# Altium PCB ZLS-028.PcbDoc
Units mil, origin at the board's own origin, x right, y up, seen from the top; angles counter-clockwise.
Board outline 5999.86 x 2000.09 mil, 3 copper layers (Top Layer, OVA, Bottom Layer), stack 16.817 mil thick; 18 components, 48 nets, 187 pads, 13 vias.
Unrouted connection lines stored in the file: 12.
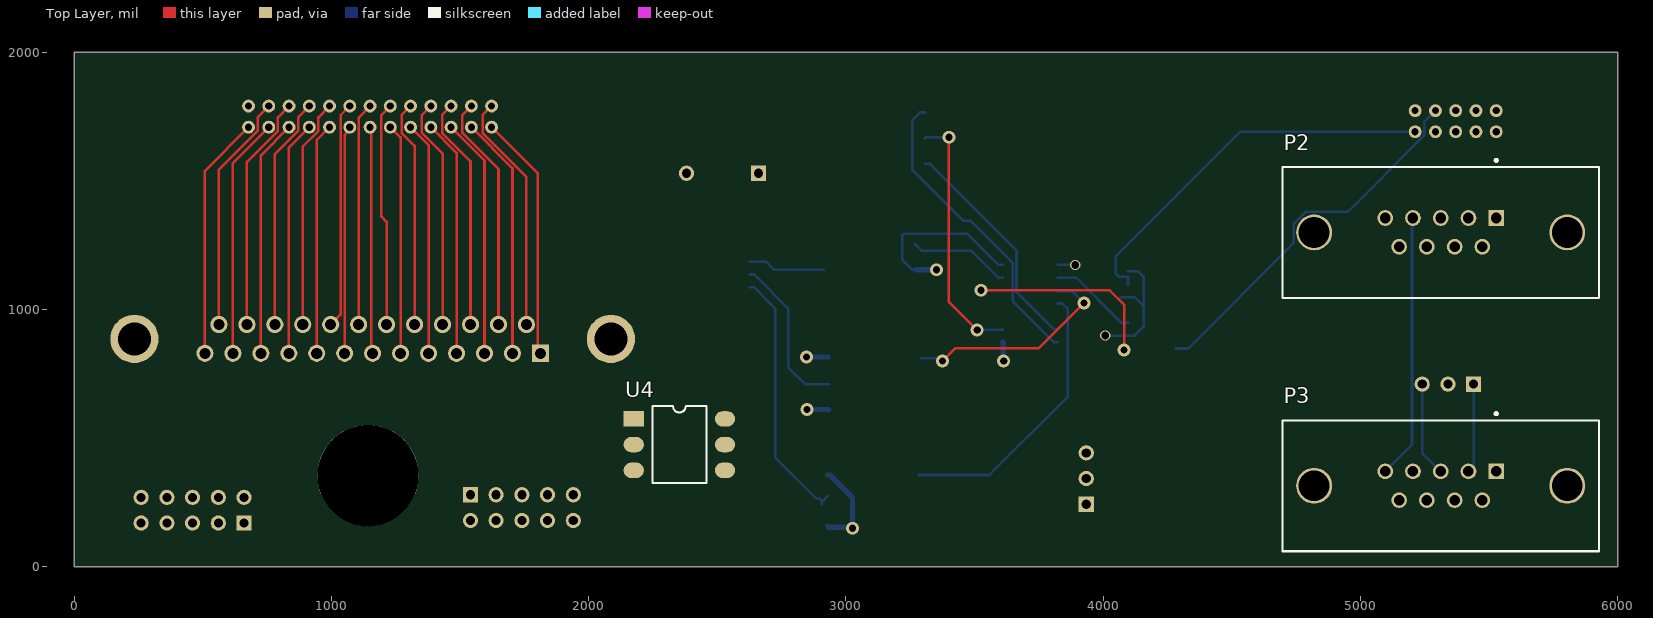
[diagram p0: Top Layer view]
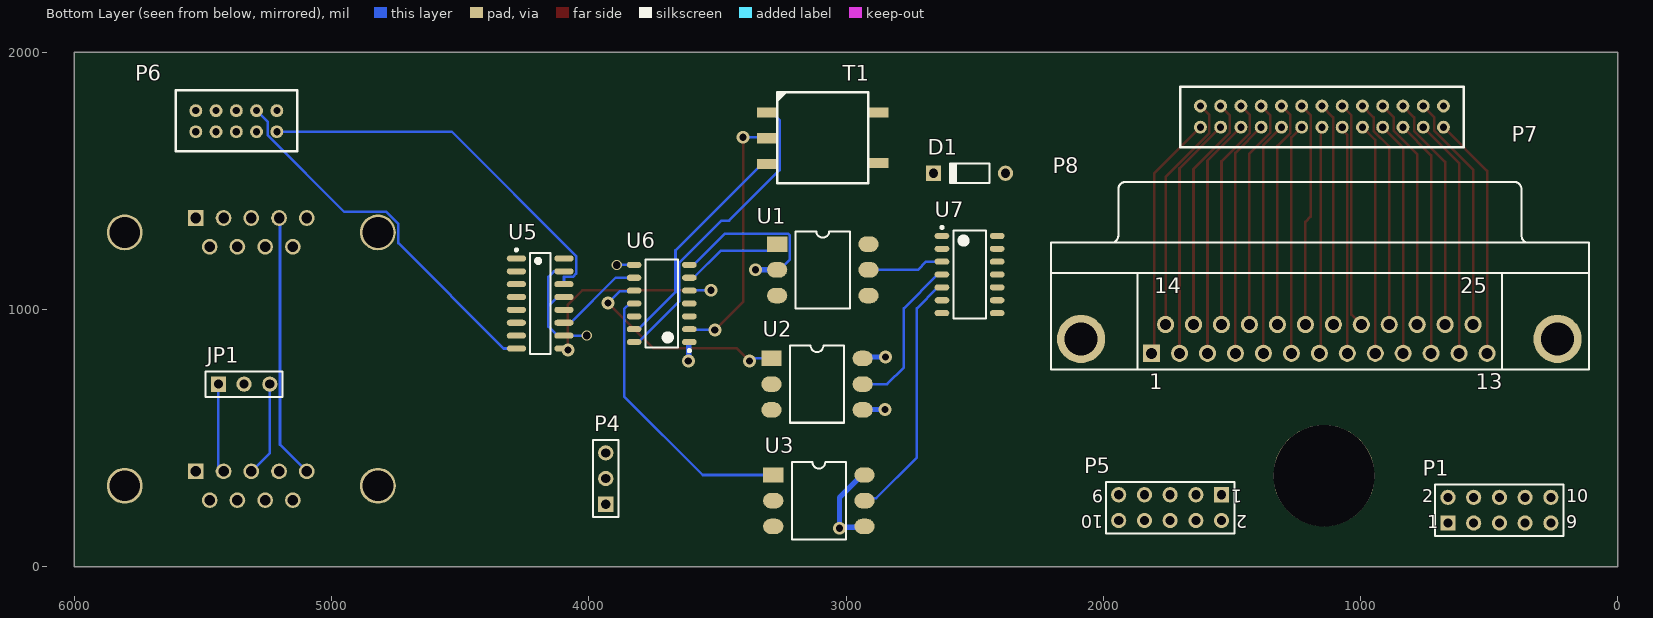
[diagram p1: Bottom Layer view, seen from below]
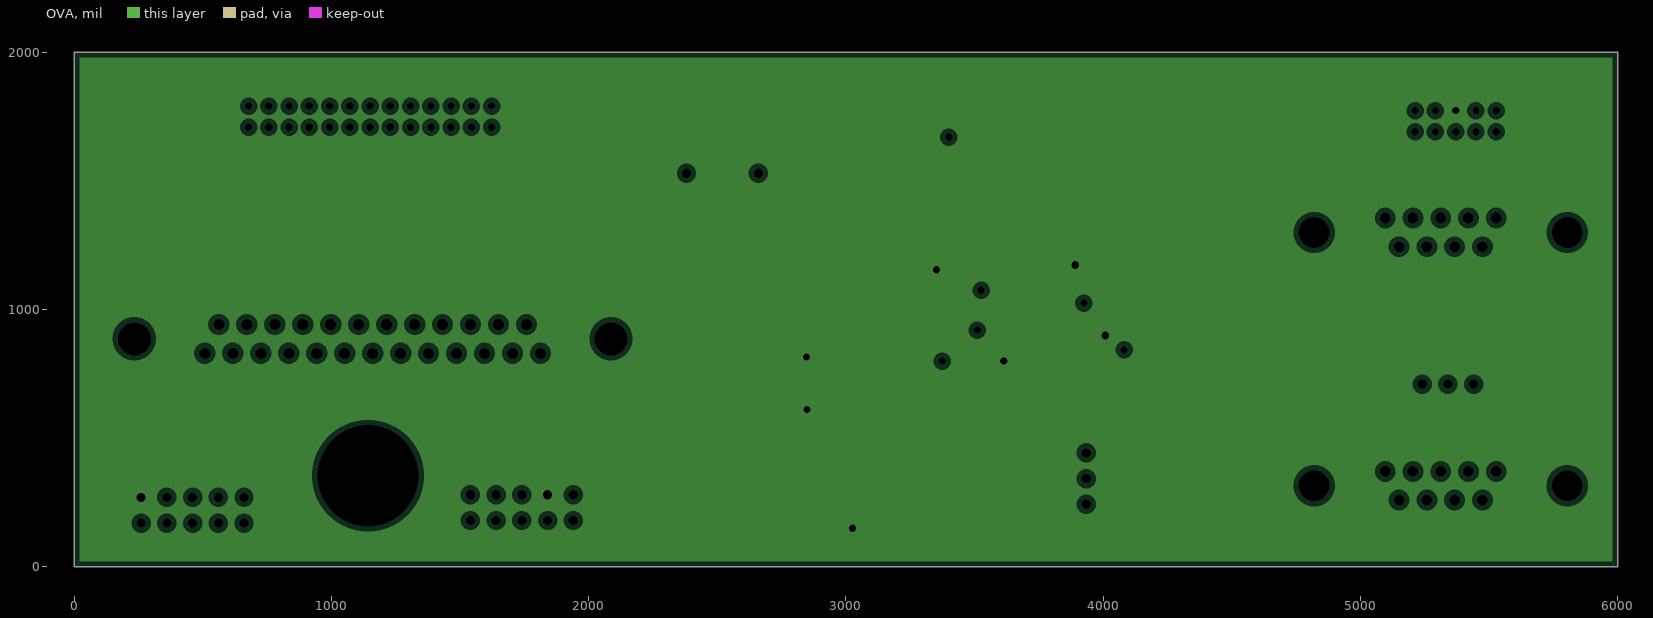
[diagram p2: OVA, clearances drawn from the general rule]

## Layer stack, top to bottom
Top Solder: solder mask 0.4, Solder Resist, Dk 3.5
Top Layer: signal copper 1.4
OVA: plane copper 1.417, net OVA
Dielectric 1: dielectric 12.6, FR-4, Dk 4.8
Bottom Layer: signal copper 1.4
Bottom Solder: solder mask 0.4, Solder Resist, Dk 3.5

## Board outline
0.14,2000.09 0.14,0 6000,0 6000,2000.09

## Design rules (kind name [scope] priority, off if disabled: settings)
Clearance [All] p1: gap=5 ignorepadtopadclearanceinfootprint=FALSE
PlaneClearance [All] p1: clearance=20
PlaneConnect [All] p1: planeconnectstyle=Relief reliefexpansion=20 reliefentries=4 reliefconductorwidth=10 reliefairgap=10
PolygonConnect [All] p1: connectstyle=Relief reliefconductorwidth=10 reliefentries=4 polygonreliefangle="90 Angle" airgapwidth=10
RoutingVias [All] p1: holewidth=15 width=30 viastyle="Through Hole" minholewidth=15 minwidth=30 maxholewidth=28 maxwidth=50
SolderMaskExpansion [All] p1: expansion=4
Width [All] p1: maxlimit=50 minlimit=10 preferedwidth=10
28 further rules are at their usual default settings.

## Classes and differential pairs
component class Connectors: JP1 P1 P2 P3 P5 P6 P7 P8
component class ZLS-028: D1 P4 T1 U1 U2 U3 U4 U5 U6 U7

## Components (designator, comment, footprint, x,y, rotation, side; value= is the part's Value field where it differs from the comment)
D1 "Diode 1N4148" DO-35 2519.69,1529.92 r0 bottom
JP1 "Header 3" HDR1X3 5440,710 r180 bottom
P1 "Header 5X2" HDR2X5 660,170 r180 bottom
P2 "1-5747150-4" TECO-1-5747150-4_V 5312,1300 r0 top locked
P3 "1-5747150-4" TECO-1-5747150-4_V 5312,315 r0 top locked
P4 "Header 3" HDR1X3 3934,243 r90 bottom
P5 "Header 5X2" HDR2X5 1540,280 r0 bottom
P6 "STMM-105-01-G-D" STMM-105-01-G-D 5370.08,1732.28 r0 bottom
P7 "2.00 mm Shrouded Terminal Strip, Cable Mate" STMM-113-01-G-D 1150,1750 r180 bottom
P8 "D Connector 25" DSUB1.385-2H25A 1160,1260 r180 bottom locked
T1 "78250MC" 78250MC 3307.09,1766.14 r180 bottom
U1 "4N26" "6-SMD Gull Wing" 3267.72,1254.33 r180 bottom
U2 "4N26" "6-SMD Gull Wing" 3290,810 r180 bottom
U3 "4N26" "6-SMD Gull Wing" 3283,357 r180 bottom
U4 "4N26" "6-SMD Gull Wing" 2175,575 r0 top
U5 "MAX232AESE+" MAXM-S16+5_L 4188.98,1023.62 r180 bottom
U6 "MAX250ESD+" MAX250ESD+ 3716.54,1023.62 r0 bottom
U7 "MAX251ESD+" MAX250ESD+ 2519.69,1136.22 r180 bottom

## Footprints (in the part's own frame and the unit in brackets; to place one, negate y for a bottom-side part, rotate by r counter-clockwise, add the part's x,y. Pads: shape width x height; smd on the part's side, far side on the other; paste and mask are expansions set on the pad)
"6-SMD Gull Wing" [mm]
  rect 2x1.52 smd: 1(0,0)
  oval 2x1.52 smd: 2(0,-2.54) 3(0,-5.08) 4(9.01,-5.08) 5(9.01,-2.54) 6(9.01,0)
  silkscreen extent 1.84,-6.35 7.18,1.27, body extent 1.74,-6.45 7.27,1.37, height 5
78250MC [mm]
  rect 2x1 smd: 1(0,0) 2(0,-2.54) 3(0,-5.08) 4(11,-5) 6(11,0)
  silkscreen extent 1,-7 10,2, body extent -1,-7 12,2, height 7
DO-35 [mm] "Diode, Axial; Body 3.8 x 1.9 mm (LxDia. max), Lead Dia. 0.53 mm (max)"
  round 1.5 hole 0.9: 1(-3.55,0)
  rect 1.5x1.5 hole 0.9: 2(3.55,0)
  silkscreen extent -1.95,-0.95 2.05,0.95
DSUB1.385-2H25A [mm] "Connector; D Subminiature; 25 Position; Right Angle; Pitch 1.385 mm"
  rect 1.69x1.69 hole 1.09: 1(-16.566,-10.92)
  round 1.69 hole 1.09: 2(-13.805,-10.92) 3(-11.044,-10.92) 4(-8.283,-10.92) 5(-5.522,-10.92) 6(-2.761,-10.92) 7(0,-10.92) 8(2.761,-10.92) 9(5.522,-10.92) 10(8.283,-10.92) 11(11.044,-10.92) 12(13.805,-10.92) 13(16.566,-10.92) 14(-15.186,-8.08) 15(-12.425,-8.08) 16(-9.663,-8.08) 17(-6.903,-8.08) 18(-4.142,-8.08) 19(-1.381,-8.08) 20(1.38,-8.08) 21(4.142,-8.08) 22(6.902,-8.08) 23(9.663,-8.08) 24(12.424,-8.08) 25(15.185,-8.08)
  round 4.76 hole 3.26: 26(-23.526,-9.5) 27(23.526,-9.5)
  silkscreen extent -26.5,-12.5 26.6,6
HDR1X3 [mm] "Connector; Header; 3 Position"
  rect 1.5x1.5 hole 0.9: 1(0,0)
  round 1.5 hole 0.9: 2(2.54,0) 3(5.08,0)
  silkscreen extent -1.27,-1.27 6.35,1.27
HDR2X5 [mm] "Connector; Header; 5x2 Position"
  rect 1.5x1.5 hole 0.9: 1(0,0)
  round 1.5 hole 0.9: 2(0,2.54) 3(2.54,0) 4(2.54,2.54) 5(5.08,0) 6(5.08,2.54) 7(7.62,0) 8(7.62,2.54) 9(10.16,0) 10(10.16,2.54)
  silkscreen extent -1.27,-1.27 11.43,3.81
MAX250ESD+ [mm] "SOIC, 14-Leads, Body 8.64x3.90mm, Pitch 1.27mm, IPC Medium Density"
  oval 1.45x0.6 smd: 1(-2.725,3.81) 2(-2.725,2.54) 3(-2.725,1.27) 4(-2.725,0) 5(-2.725,-1.27) 6(-2.725,-2.54) 7(-2.725,-3.81) 8(2.725,-3.81) 9(2.725,-2.54) 10(2.725,-1.27) 11(2.725,0) 12(2.725,1.27) 13(2.725,2.54) 14(2.725,3.81)
  silkscreen extent -2.85,-4.35 1.6,4.78, body extent -2,-4.35 2,4.35, height 1.76
MAXM-S16+5_L [mm] "SOIC, 16-Leads, Body 10x4mm, Pitch 1.27mm, IPC High Density"
  oval 1.9x0.6 smd: 1(-2.35,4.445) 2(-2.35,3.175) 3(-2.35,1.905) 4(-2.35,0.635) 5(-2.35,-0.635) 6(-2.35,-1.905) 7(-2.35,-3.175) 8(-2.35,-4.445) 9(2.35,-4.445) 10(2.35,-3.175) 11(2.35,-1.905) 12(2.35,-0.635) 13(2.35,0.635) 14(2.35,1.905) 15(2.35,3.175) 16(2.35,4.445)
  silkscreen extent -2.48,-5 1,5.42, body extent -2,-5 2,5, height 1.75
STMM-105-01-G-D [mm]
  round 1.27 hole 0.71: 1(-4,-1.04) 2(-4,1.04) 3(-2,-1.04) 4(-2,1.04) 5(0,-1.04) 6(0,1.04) 7(2,-1.04) 8(2,1.04) 9(4,-1.04) 10(4,1.04)
  silkscreen extent -6,-3.04 6,2.96, body extent -8.08,-4.52 8.08,3.02, height 5.19
STMM-113-01-G-D [mm] "Headers & Wire Housings MGrid Hdr Shrd Vt 0. rd Vt 0.38AuLF 26Ckt"
  round 1.27 hole 0.71: 1(-12,-1.04) 2(-12,1.04) 3(-10,-1.04) 4(-10,1.04) 5(-8,-1.04) 6(-8,1.04) 7(-6,-1.04) 8(-6,1.04) 9(-4,-1.04) 10(-4,1.04) 11(-2,-1.04) 12(-2,1.04) 13(0,-1.04) 14(0,1.04) 15(2,-1.04) 16(2,1.04) 17(4,-1.04) 18(4,1.04) 19(6,-1.04) 20(6,1.04) 21(8,-1.04) 22(8,1.04) 23(10,-1.04) 24(10,1.04) 25(12,-1.04) 26(12,1.04)
  silkscreen extent -14,-3.04 14,2.96, body extent -16.08,-3.52 16.08,3.02, height 5.19
TECO-1-5747150-4_V [mm] "Connector, 9-Leads, Body 31.27x12.93mm, Pitch 2.74mm"
  rect 1.55x1.55 hole 1.04: 1(5.48,1.42)
  round 1.55 hole 1.04: 2(2.74,1.42) 3(0,1.42) 4(-2.74,1.42) 5(-5.48,1.42) 6(4.11,-1.42) 7(1.37,-1.42) 8(-1.37,-1.42) 9(-4.11,-1.42)
  round 3.55 hole 3.05 unplated: MH1(-12.495,0) MH2(12.495,0)
  silkscreen extent -15.63,-6.47 15.64,7.24, body extent -15.48,-6.3 15.48,6.3, height 12.85

## Part data
D1: "High Conductance Fast Diode", Code_JEDEC=DO-204-AH, ComponentLink1Description="Manufacturer Link", ComponentLink1URL=http://www.fairchildsemi.com/, ComponentLink2Description=Datasheet, ComponentLink2URL=http://www.fairchildsemi.com/ds/1N%2F1N4148.pdf, DatasheetVersion=1997, LatestRevisionDate=17-Jul-2002, LatestRevisionNote="Re-released for DXP Platform.", PackageDescription="Diode, Axial; Body 3.8 x 1.9 mm (LxDia. max), Lead Dia. 0.53 mm (max)", PackageReference=DO-35, Published=8-Jun-2000, Publisher="Altium Limited"
JP1 P4: "Header, 3-Pin", LatestRevisionDate=17-Jul-2002, LatestRevisionNote="Re-released for DXP Platform.", Publisher="Altium Limited"
P1 P5: "Header, 5-Pin, Dual row", LatestRevisionDate=17-Jul-2002, LatestRevisionNote="Re-released for DXP Platform.", Publisher="Altium Limited"
P2 P3: library part CMP-2000-05406-1, "D-SUB Connector, Standard, Pitch 1.37 mm, 9 Position, Height 12.16 mm, Tail Length 3.18 mm, RoHS, Tube", Color=Black, Current Rating=6A, Manufacturer="TE Connectivity", Operating Temperature=-55degC~105degC, Standard Package=17, Voltage Rating=125V, 3D Model=1-5747150-4.pdf, Catalog Drawings=HD-20FrontMetalSide, Category=Connectors,Interconnects, Connector Style=D-Sub, Connector Type=Receptacle,FemaleSockets, Contact Finish=Gold, Contact Finish Thickness=30µin(0.76µm), Contact Type=Signal, Datasheet URL=http://www.produktinfo.conrad.com/datenblaetter/1200000-1299999/001281820-da-01-en-SUB_D_BUCHSENLEISTE_OHNE_SCHIRMFIEDERUNG.pdf, Datasheet Version="Rev. A1, 03/2011", Dynamic Catalog=AMPLIMITEHD-20Series, Family=D-SubConnectors, Featured Product=AMPLIMITED-SubminiatureConnectors, Flange Feature=MatingSide;FemaleScrewlock(4-40), Housing Material=Polyester, Manufacturer URL=http://www.te.com/, Mating Products="AML09B-ND / -CONND-SUBPLUG9POSGOLD", Mounting Type=ThroughHole, Number of Positions=9, Number of Rows=2, Other Names=A32059, Product Training Modules=AMPLIMITED-SubConnectors, RoHS Information=1-5747150-4StatementofCompliance, Series=AMPLIMITEHD-20, Shell Material, Finish=Steel,TinPlated, Shell Size, Connector Layout=1(DE,E), Termination=Solder
P6: Manufacturer=SAMTEC, Supplier Part Number 1=67P3933, ComponentLink1Description=https://webassistants.partcommunity.com/23d-libs/samtec/search/resolve.html?EMAIL=mysamtec@samtec.com&PN=HTSW-114-05-F-D, ComponentLink1URL=https://webassistants.partcommunity.com/23d-libs/samtec/search/resolve.html?EMAIL=mysamtec@samtec.com&PN=HTSW-114-05-F-D, Manufacturer Part Number=STMM-105-01-G-D, Pricing 1="1=4.7, 10=4.11, 100=3.48, 500=2.98, 1000=2.6, 5000=2.3, 10000=2.19 (USD)", Stock 1=0, Supplier 1=Newark
P7: library part STMM-113-01-G-D
P8: "Receptacle Assembly, 25 Position, Right Angle", PackageDocument=U, DatasheetDocument=19-Mar-1999, Gender=Receptacle, LatestRevisionDate=17-Jul-2002, LatestRevisionNote="Re-released for DXP Platform.", Orientation="Right Angle", PackageReference=787202, Positions=25, Published=15-Jun-2001, Publisher="Altium Limited"
T1: library part "Trans CT", "Center-Tapped Transformer", Manufacturer="Murata Power Solutions Inc.", Supplier Part Number 1=811-1276-5-ND, Category=Transformers, ComponentLink1Description=http://www.murata-ps.com/data/magnetics/kmp_78250.pdf, ComponentLink1URL=http://www.murata-ps.com/data/magnetics/kmp_78250.pdf, For Use With/Related Products="MAX250, MAX251", Height - Seated (Max)="0.260\" (6.60mm)", Manufacturer Part Number=78250MC, Mounting Type="Surface Mount", Part Status=Active, Pricing 1="1=2.66, 5=2.64, 10=2.62, 25=2.59, 50=2.52, 100=2.41, 250=2.24, 500=2.1, 1000=2.0881 (USD)", RoHS="RoHS Compliant", Size / Dimension="0.354\" L x 0.375\" W (9.00mm x 9.52mm)", Stock 1=1545, Supplier 1=Digi-Key, Weight="0.04 oz (1.14g)"
U1 U2 U3 U4: Current - Output / Channel=-, Current Transfer Ratio (Min)="20% @ 10mA", Manufacturer="ON Semiconductor", Manufacturer Part Number=4N26SR2M, Operating Temperature="-40°C ~ 100°C", Package / Case="6-SMD, Gull Wing", Supplier Device Package=6-SMD, Supplier Part Number 1=4N26SR2MCT-ND, Voltage - Forward (Vf) (Typ)=1.18V, Voltage - Isolation=4170Vrms, Voltage - Output (Max)=30V, Category=Isolators, ComponentLink1Description=https://www.fairchildsemi.com/datasheets/4N/4N25M.pdf, ComponentLink1URL=https://www.fairchildsemi.com/datasheets/4N/4N25M.pdf, Current Transfer Ratio (Max)=-, Input Type=DC, Mounting Type="Surface Mount", Output Type="Transistor with Base", Packaging="Cut Tape (CT)", Part Status=Active, Pricing 1="1=0.7, 10=0.546, 100=0.3918, 500=0.30084 (USD)", Rise / Fall Time (Typ)=-, RoHS="RoHS Compliant", Stock 1=2956, Supplier 1=Digi-Key, Turn On / Turn Off Time (Typ)="2µs, 2µs", Vce Saturation (Max)=500mV
U5: library part CMP-1675-00002-1, "IC TXRX 2/2 FULL RS232 16SOIC", Manufacturer="Maxim Integrated", Operating Temperature="-40°C ~ 85°C", Package / Case="16-SOIC (0.154\", 3.90mm Width)", Supplier Device Package=16-SOIC, Supplier Part Number 1=MAX232AESE+-ND, Voltage - Supply="4.5 V ~ 5.5 V", Category="Integrated Circuits (ICs)", ComponentLink1Description=https://datasheets.maximintegrated.com/en/ds/MAX220-MAX249.pdf, ComponentLink1URL=https://datasheets.maximintegrated.com/en/ds/MAX220-MAX249.pdf, Data Rate=200kbps, Duplex=Full, Manufacturer Part Number=MAX232AESE+, Mounting Type="Surface Mount", Number of Drivers/Receivers=2/2, Packaging=Tube, Part Status=Active, Pricing 1="1=4.85, 10=4.608, 25=4.3, 50=4.223 (USD)", Protocol=RS232, RoHS="RoHS Compliant", Stock 1=1445, Supplier 1=Digi-Key, Type=Transceiver
U6: Supplier Part Number 1=MAX250ESD+-ND, Supplier 1=Digi-Key
U7: Manufacturer="Maxim Integrated", Operating Temperature="-40°C ~ 85°C", Package / Case="14-SOIC (0.154\", 3.90mm Width)", Supplier Device Package=14-SOIC, Supplier Part Number 1=MAX251ESD+-ND, Voltage - Supply="4.5 V ~ 5.5 V", Category="Integrated Circuits (ICs)", ComponentLink1Description=http://datasheets.maximintegrated.com/en/ds/MAX250-MAX251.pdf, ComponentLink1URL=http://datasheets.maximintegrated.com/en/ds/MAX250-MAX251.pdf, Data Rate=-, Duplex=Full, Manufacturer Part Number=MAX251ESD+, Mounting Type="Surface Mount", Number of Drivers/Receivers=2/2, Packaging=Tube, Part Status=Active, Pricing 1="1=7.66, 10=7.277, 25=6.79, 50=6.6714 (USD)", Protocol=RS232, RoHS="RoHS Compliant", Stock 1=70, Supplier 1=Digi-Key, Type=Transceiver

## Free pads (board coordinates)
  round 393.7 hole 393.7: ""(1141.87,354.42)

## Via types
v1: diameter 50, hole 28, Top Layer to Bottom Layer, 11 vias
v2: diameter 40, hole 30, Top Layer to Bottom Layer, 2 vias

## Nets (pads, with @x,y where several pads share a name; then routed paths per layer and width w, separated by ;. In a path a pad name is that pad's centre, name@x,y a point inside that pad or via, vN(x,y) a via of type N, cw(c..) or ccw(c..) an arc to the next point about the centre after c; other vN are vias at no path point)
1Hz: P5.10
+5: P1.9 T1.1 U6.14 | length 1186.6
  Bottom Layer w10: T1.1 3287.4,1766.14 3257.72,1736.46 3257.72,1542.32 3454.34,1345.7 3484.76,1345.7 3647.8,1182.66 3647.8,1032.91 3807.09,873.62 U6.14
NetD1_1: D1.1 U7.13
NetD1_2: D1.2 T1.6 U7.1
NetJP1_1: JP1.1 P3.2 | length 347.4
  Bottom Layer w10: P3.2 5440,391.03 JP1.1
NetJP1_3: JP1.3 P3.3 | length 368.9
  Bottom Layer w10: JP1.3 5240,442.9 P3.3
NetLabel151: P6.10
NetP6_2: P6.2 U5.14 | length 1512.8
  Bottom Layer w10: U5.14 4096.46,1126.81 4061.83,1126.81 4049.06,1139.59 4049.06,1207.66 4532.74,1691.34 P6.2
NetP6_3: P6.3 U5.8 | length 1467.7
  Bottom Layer w10: U5.8 4330.86,848.62 4740.19,1257.95 4740.19,1333.09 4786.98,1379.88 4950.64,1379.88 5247.6,1676.84 5247.6,1729.49 P6.3
NetT1_3: T1.3 U6.13 | length 877.9
  Bottom Layer w10: T1.3 3326.77,1566.14 3662.8,1230.12 3662.8,1067.91 3807.09,923.62 U6.13
OVA: P1.10 P5.7 P6.5 U1.2 U2.4 U2.6 U3.4 U3.6 U5.10 U5.13 U5.15 U6.1 U6.7 U6.8 | length 1897.1
  Bottom Layer w10: U3.4@2924.27,161 U3.4 ; U2.4@2929.61,604.33 U2.4 U2.4@2934.28,611 ; U2.6@2930.28,815 U2.6 ; U1.2@3269.67,1155 3269,1154.33 U1.2 3258.27,1154.33 3218.35,1194.25 3218.35,1288.39 3224.2,1294.25 3471.89,1294.25 3592.52,1173.62 U6.7 ; v1@3609.25,803.75 v1(3613,800) ; U6.8 v2(3891,1173.62) ; v2(4008,899) 4008.19,898.81 4096.27,898.81 U5.10 4122.05,898.62 4157,933.57 4157,1127 4135.38,1148.62 U5.15 ; U5.13@4070.87,1048.62 4122.05,1048.62 4157,1013.67
  Bottom Layer w20: v1(2847,815) U2.6@2930.28,815 ; v1(2849,611) U2.4@2934.28,611 ; U3.6 2937.72,357 3025,269.72 v1(3025,150) 3021.5,153.5 U3.4@2931.78,153.5 ; U1.2@3269.67,1155 v1(3352,1155) ; v1@3609.25,803.75 3611.13,805.62 3611.13,871.95 3609.45,873.62 U6.1
OVB: P2.4 P3.5 T1.4 U1.4 U1.6 U2.2 U3.2 | length 1029.7
  Bottom Layer w10: P3.5 5200.47,475.13 5200.47,1352.25 P2.4
P7-1: P7.1 P8.1 | length 957.6
  Top Layer w10: P7.1 1801.12,1530.37 1801.12,841.16 P8.1
P7-2: P7.2 P8.14 | length 934.1
  Top Layer w10: P7.2 1587.44,1755.95 1587.44,1686.53 1757.85,1516.11 P8.14
P7-3: P7.3 P8.2 | length 945.2
  Top Layer w10: P7.3 1703.5,1549.25 P8.2
P7-4: P7.4 P8.15 | length 921.7
  Top Layer w10: P7.4 1508.7,1755.95 1508.7,1686.53 1649.15,1546.07 P8.15
P7-5: P7.5 P8.3 | length 932.8
  Top Layer w10: P7.5 1594.8,1579.21 P8.3
P7-6: P7.6 P8.16 | length 909.3
  Top Layer w10: P7.6 1429.96,1755.95 1429.96,1686.53 1540.45,1576.04 P8.16
P7-7: P7.7 P8.4 | length 920.3
  Top Layer w10: P7.7 1486.1,1609.17 P8.4
P7-8: P7.8 P8.17 | length 896.9
  Top Layer w10: P7.8 1351.22,1755.95 1351.22,1686.53 1431.75,1606 P8.17
P7-9: P7.9 P8.5 | length 907.9
  Top Layer w10: P7.9 1377.4,1639.13 P8.5
P7-10: P7.10 P8.18 | length 884.5
  Top Layer w10: P7.10 1272.48,1755.95 1272.48,1686.53 1323.05,1635.96 P8.18
P7-11: P7.11 P8.6 | length 895.5
  Top Layer w10: P7.11 1268.7,1669.1 P8.6
P7-12: P7.12 P8.19 | length 872.1
  Top Layer w10: P8.19 1214.35,1340.85 1193.74,1361.46 1193.74,1755.95 P7.12
P7-13: P7.13 P8.7 | length 883.1
  Top Layer w10: P7.13 1155,1704.06 1155,835.08 P8.7
P7-14: P7.14 P8.20 | length 867.4
  Top Layer w10: P8.20 1106.26,942.5 1106.26,1747.21 P7.14
P7-15: P7.15 P8.8 | length 887.2
  Top Layer w10: P8.8 1051.3,1678.27 1071.26,1698.23 P7.15
P7-16: P7.16 P8.21 | length 879.8
  Top Layer w10: P8.21 1035.69,980.63 1035.69,1755.37 P7.16
P7-17: P7.17 P8.9 | length 899.7
  Top Layer w10: P8.9 942.6,1659.13 P7.17
P7-18: P7.18 P8.22 | length 892.2
  Top Layer w10: P8.22 888.25,1634.03 948.78,1694.56 948.78,1747.21 P7.18
P7-19: P7.19 P8.10 | length 912.1
  Top Layer w10: P8.10 833.9,1629.17 P7.19
P7-20: P7.20 P8.23 | length 904.7
  Top Layer w10: P8.23 779.55,1604.07 870.04,1694.56 870.04,1747.2 P7.20
P7-21: P7.21 P8.11 | length 924.5
  Top Layer w10: P8.11 725.2,1599.21 P7.21
P7-22: P7.22 P8.24 | length 917.1
  Top Layer w10: P8.24 670.85,1574.11 791.3,1694.56 791.3,1747.2 P7.22
P7-23: P7.23 P8.12 | length 936.9
  Top Layer w10: P8.12 616.5,1569.25 P7.23
P7-24: P7.24 P8.25 | length 929.5
  Top Layer w10: P8.25 562.15,1544.15 712.56,1694.56 712.56,1747.2 P7.24
P7-25: P7.25 P8.13 | length 949.3
  Top Layer w10: P8.13 507.8,1539.29 P7.25
R1_DIN: U2.1 U6.10 | length 853.7
  Top Layer w10: v1(3375,800) 3425,850 3750,850 v1(3925,1025)
  Bottom Layer w10: U2.1 3365,810 v1(3375,800) ; U6.10 3825.63,1071.81 3878.19,1071.81 v1(3925,1025)
R1_LDR: U3.5 U7.5 | length 1006.3
  Bottom Layer w10: U7.5 2643.7,1086.22 2724.96,1004.96 2724.96,425.04 2883.46,266.54 2895.8,266.54 2905.91,256.43 U3.5@2905.91,244.09 ; U3.5@2905.91,252.64 U3.5@2928.28,275
R2_DIN: U3.1 U6.11 | length 1092.9
  Bottom Layer w10: U3.1 3557,357 3862.36,662.36 3862.36,1001.81 3840.55,1023.62 U6.11
R2OUT: U5.9 U6.5 | length 840
  Top Layer w10: v1(3525,1075) 4025,1075 4081,1019 v1(4081,843)
  Bottom Layer w10: v1(3525,1075) 3525.69,1074.31 3608.56,1074.31 U6.5
Short_1: P6.1 P6.4 P6.6
Short_2: P6.7 P6.8
T1_DIN: U1.5 U7.3 | length 299.2
  Bottom Layer w10: U7.3 2688.78,1186.22 2720.67,1154.33 U1.5
T1IN: U5.11 U6.9 | length 345.1
  Bottom Layer w10: U6.9 3895.87,1123.62 4070.87,948.62 U5.11
T2_DIN: U2.5 U7.4 | length 619.5
  Bottom Layer w10: U7.4 2643.7,1136.22 2775,1004.92 2775,775 2840,710 U2.5
T2_LDR: U1.1 U6.6 | length 395.7
  Bottom Layer w10: U1.1 3292.64,1229.41 3486.73,1229.41 3592.52,1123.62 U6.6
XFMR_TAP: T1.2 U6.2 | length 990.8
  Top Layer w10: v1(3400,1670) 3400,1030 v1(3510,920)
  Bottom Layer w10: T1.2 3310.94,1670 v1(3400,1670) ; v1(3510,920) 3511.81,921.81 3607.44,921.81 U6.2
pads on no net: JP1.2 P1.1 P1.2 P1.3 P1.4 P1.5 P1.6 P1.7 P1.8 P2.1 P2.2 P2.3 P2.5 P2.6 P2.7 P2.8 P2.9 P2.MH1 P2.MH2 P3.1 P3.4 P3.6 P3.7 P3.8 P3.9 P3.MH1 P3.MH2 P4.1 P4.2 P4.3 P5.1 P5.2 P5.3 P5.4 P5.5 P5.6 P5.8 P5.9 P6.9 P7.26 P8.26 P8.27 U1.3 U2.3 U3.3 U4.1 U4.2 U4.3 U4.4 U4.5 U4.6 U5.1 U5.2 U5.3 U5.4 U5.5 U5.6 U5.7 U5.12 U5.16 U6.3 U6.4 U6.12 U7.2 U7.6 U7.7 U7.8 U7.9 U7.10 U7.11 U7.12 U7.14

## Polygon pours and split planes (outlines as drawn)
OVA on OVA (split plane): 5979.9,20.1 20.24,20.1 20.24,1979.99 5979.9,1979.99

## Dimensions
1141.87,354.42 to 0,0 on Mechanical 1
0,0 to 1141.87,354.42 on Mechanical 1
0,0 to 233.78,885.98 on Mechanical 1
233.78,885.98 to 0,0 on Mechanical 1
4820.07,315 to 0,-1 on Mechanical 1
5803.93,1300 to 6000,0 on Mechanical 1
5803.93,315 to 6000,0 on Mechanical 1
6000,0 to 0,0 on Mechanical 1
0,0 to 0,2000 on Mechanical 1

## Text inside footprints (layer, text, board x,y; h text height)
P1: Bottom Overlay "2" at 760,250 h50; Bottom Overlay "1" at 740,150 h50; Bottom Overlay "9" at 200,150 h50; Bottom Overlay "10" at 200,250 h50
P5: Bottom Overlay "2" at 1440,200 h50 r180; Bottom Overlay "1" at 1460,300 h50 r180; Bottom Overlay "9" at 2000,300 h50 r180; Bottom Overlay "10" at 2000,200 h50 r180
P8: Bottom Overlay "25" at 611.36,1064.13 h59.06; Bottom Overlay "14" at 1802.15,1064.13 h59.06; Bottom Overlay "13" at 552.09,690.12 h59.06; Bottom Overlay "1" at 1822.05,690.12 h59.06